# Altium PCB PCB_MPPT_v2.PcbDoc
Units mm, origin at the board's own origin, x right, y up, seen from the top; angles counter-clockwise.
Board outline 95.62 x 98.98 mm, 2 copper layers (Top Layer, Bottom Layer); 94 components, 51 nets, 295 pads, 100 vias.
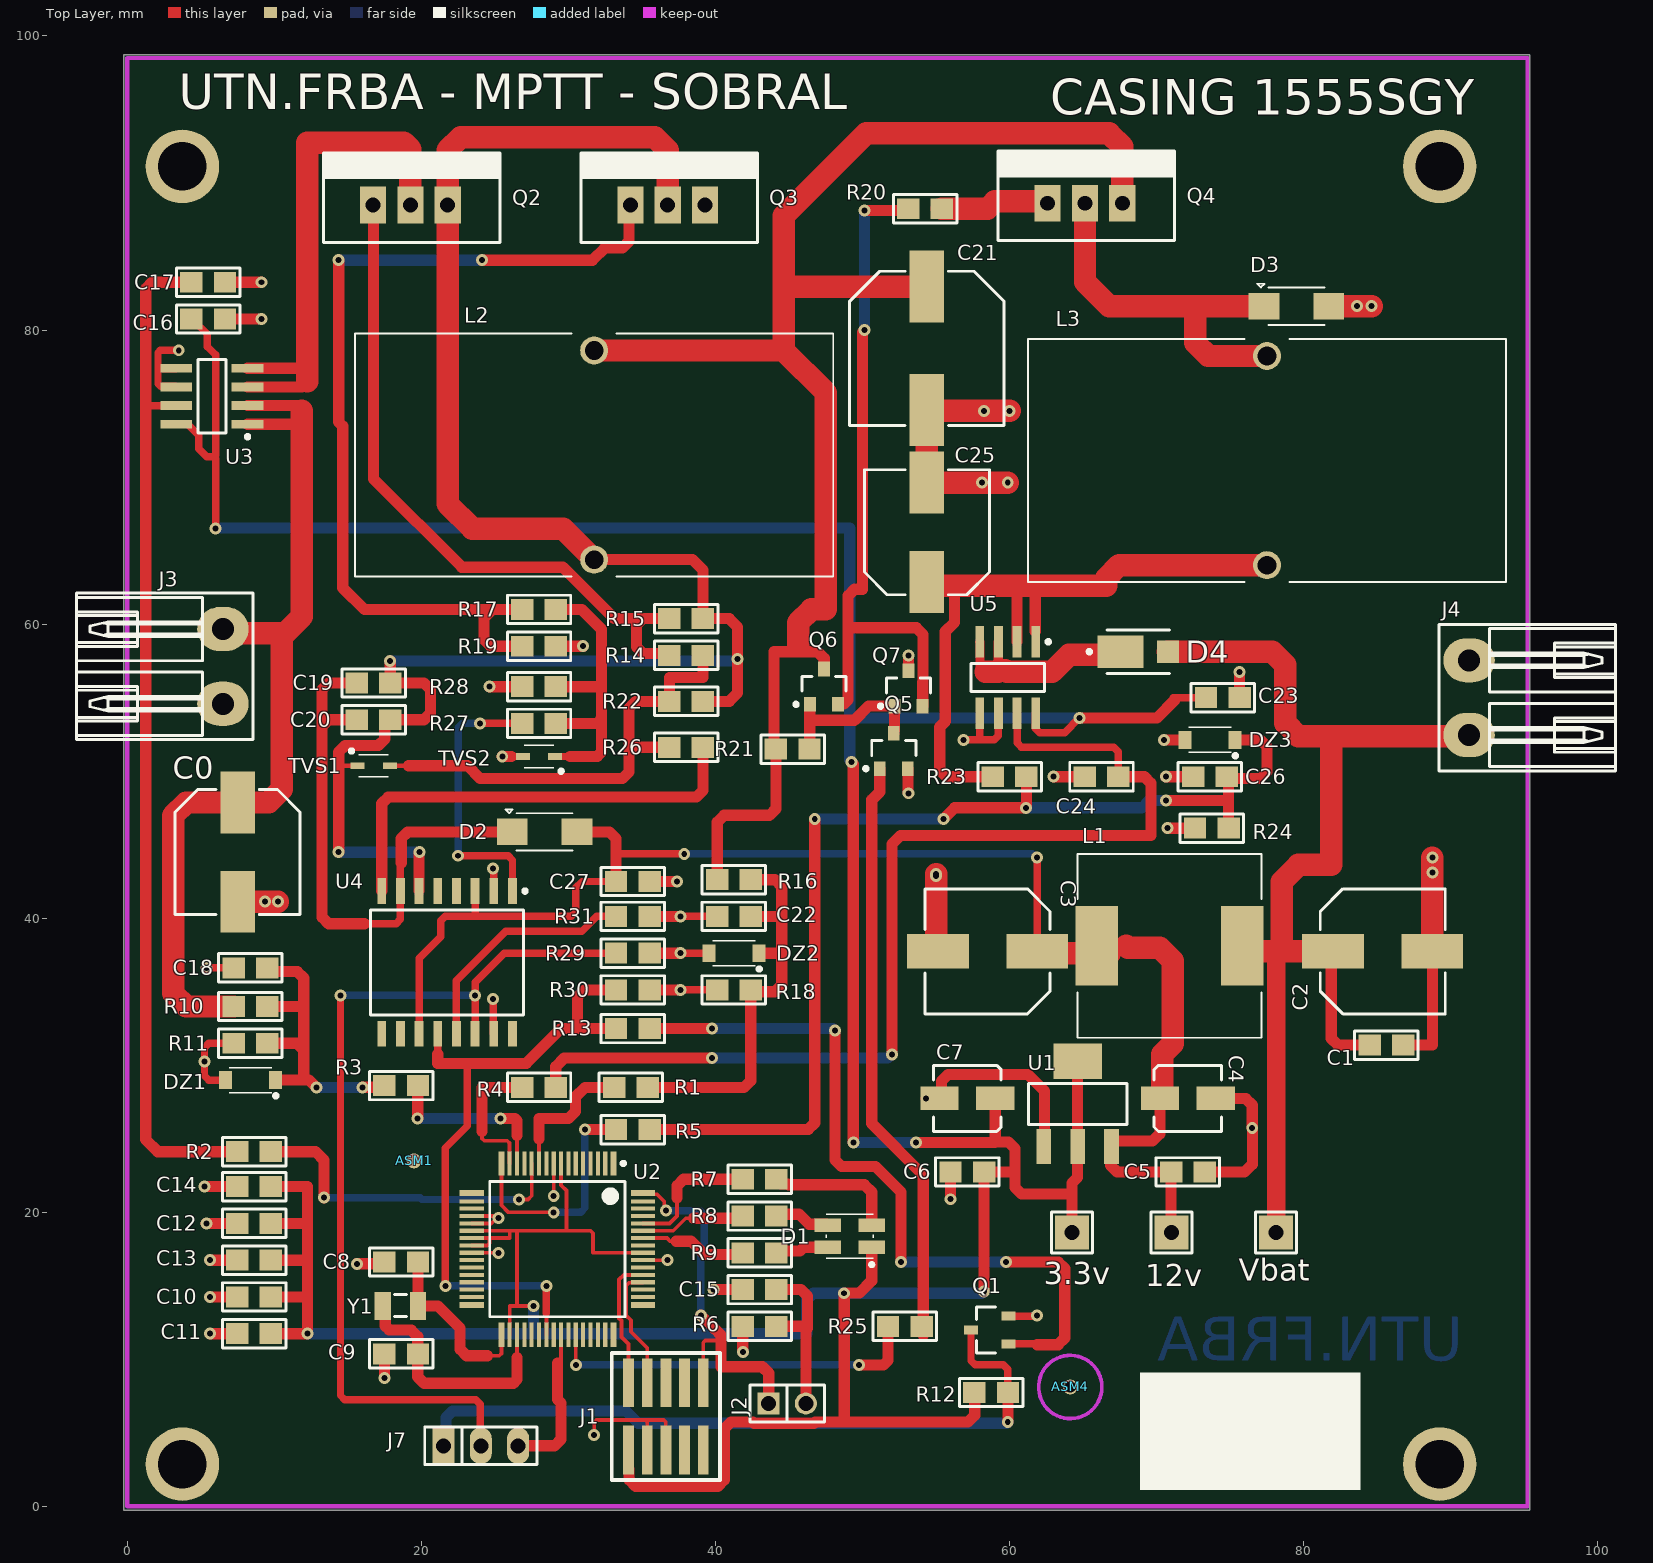
[diagram p0: Top Layer view]
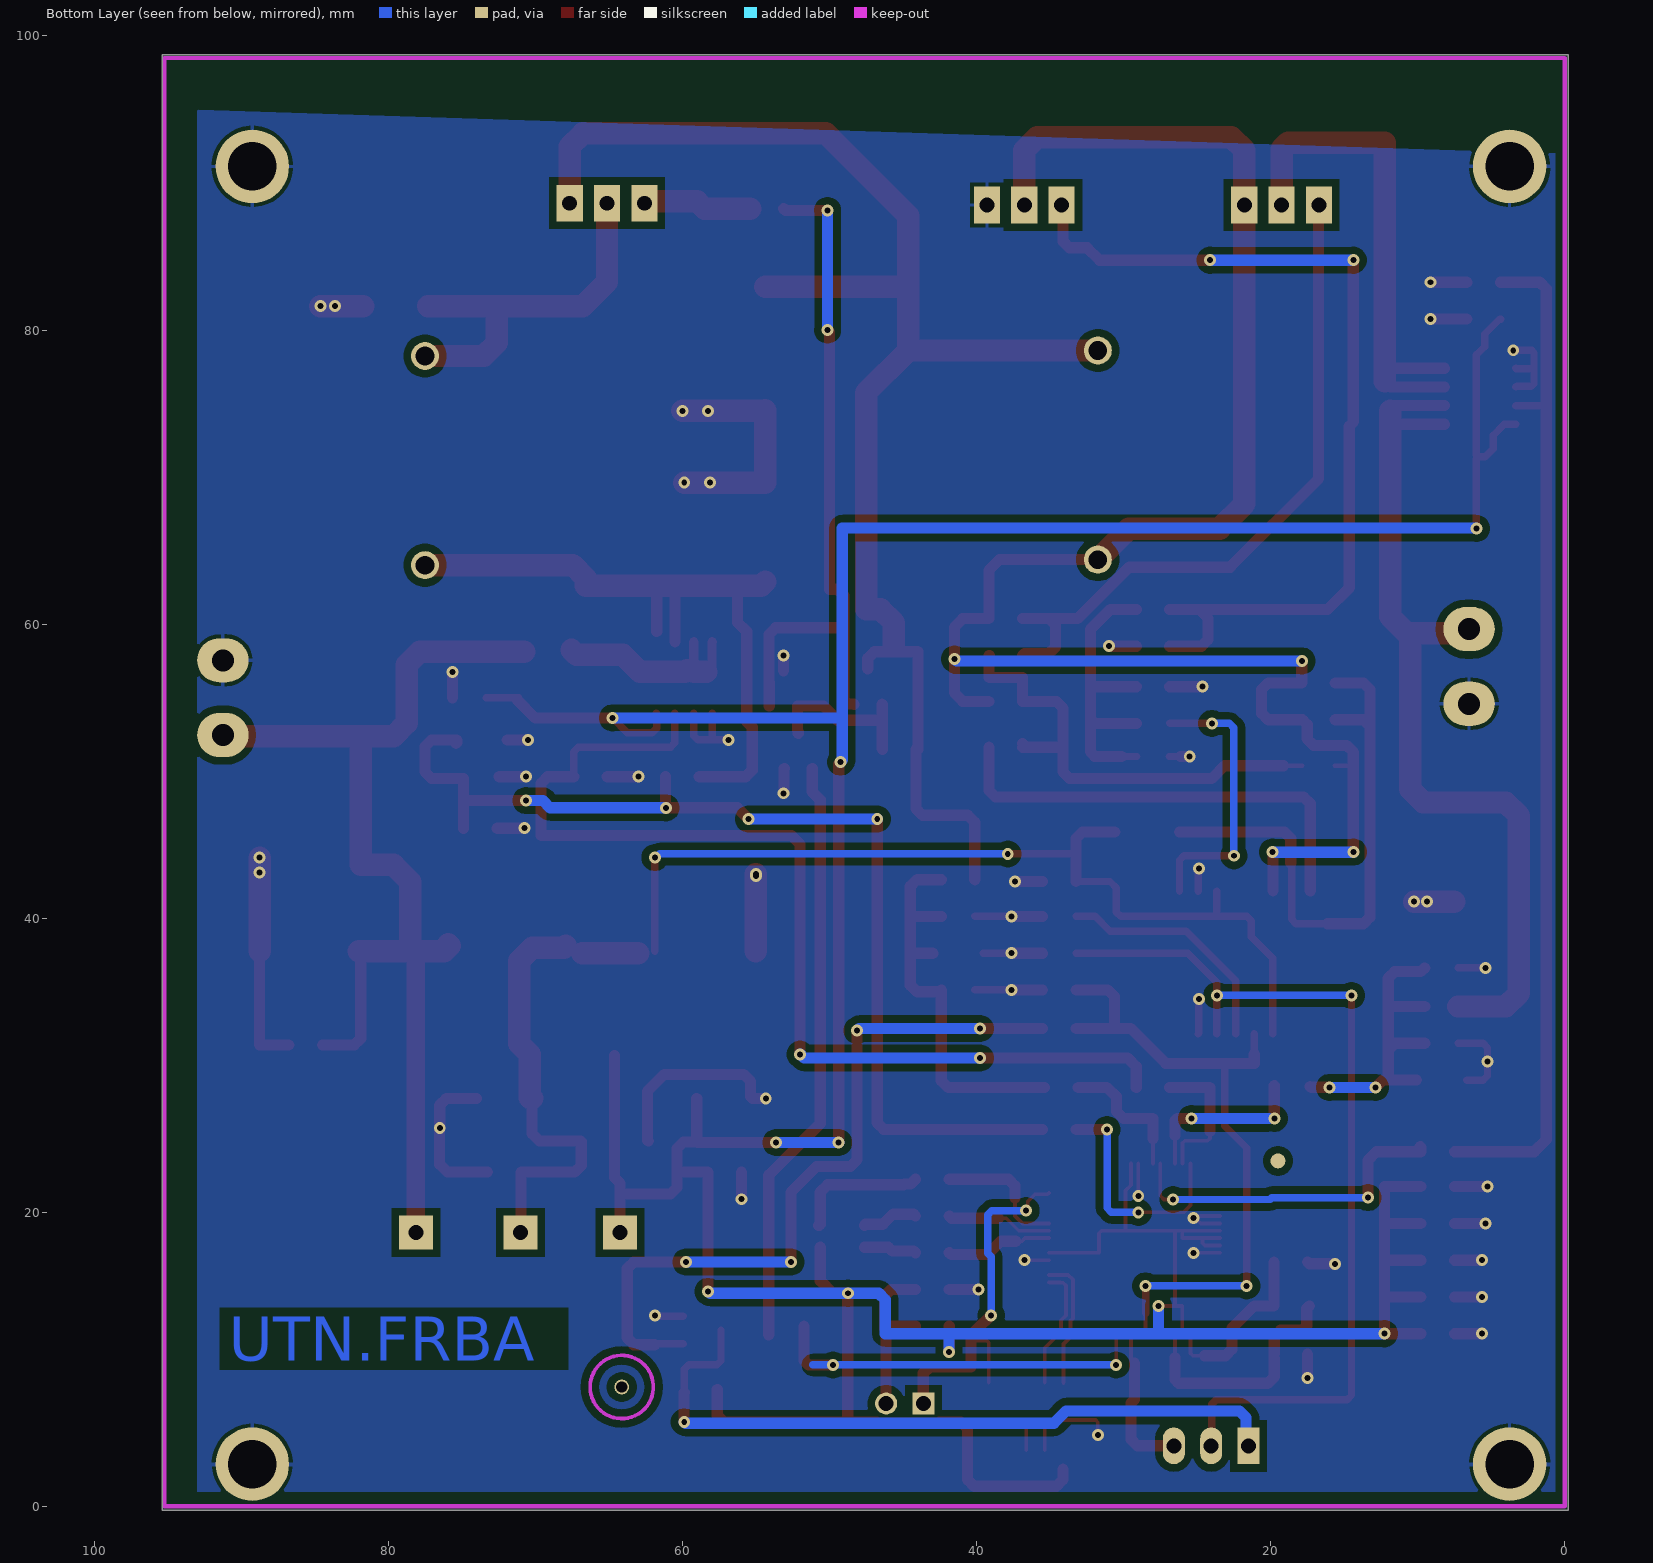
[diagram p1: Bottom Layer view, seen from below]
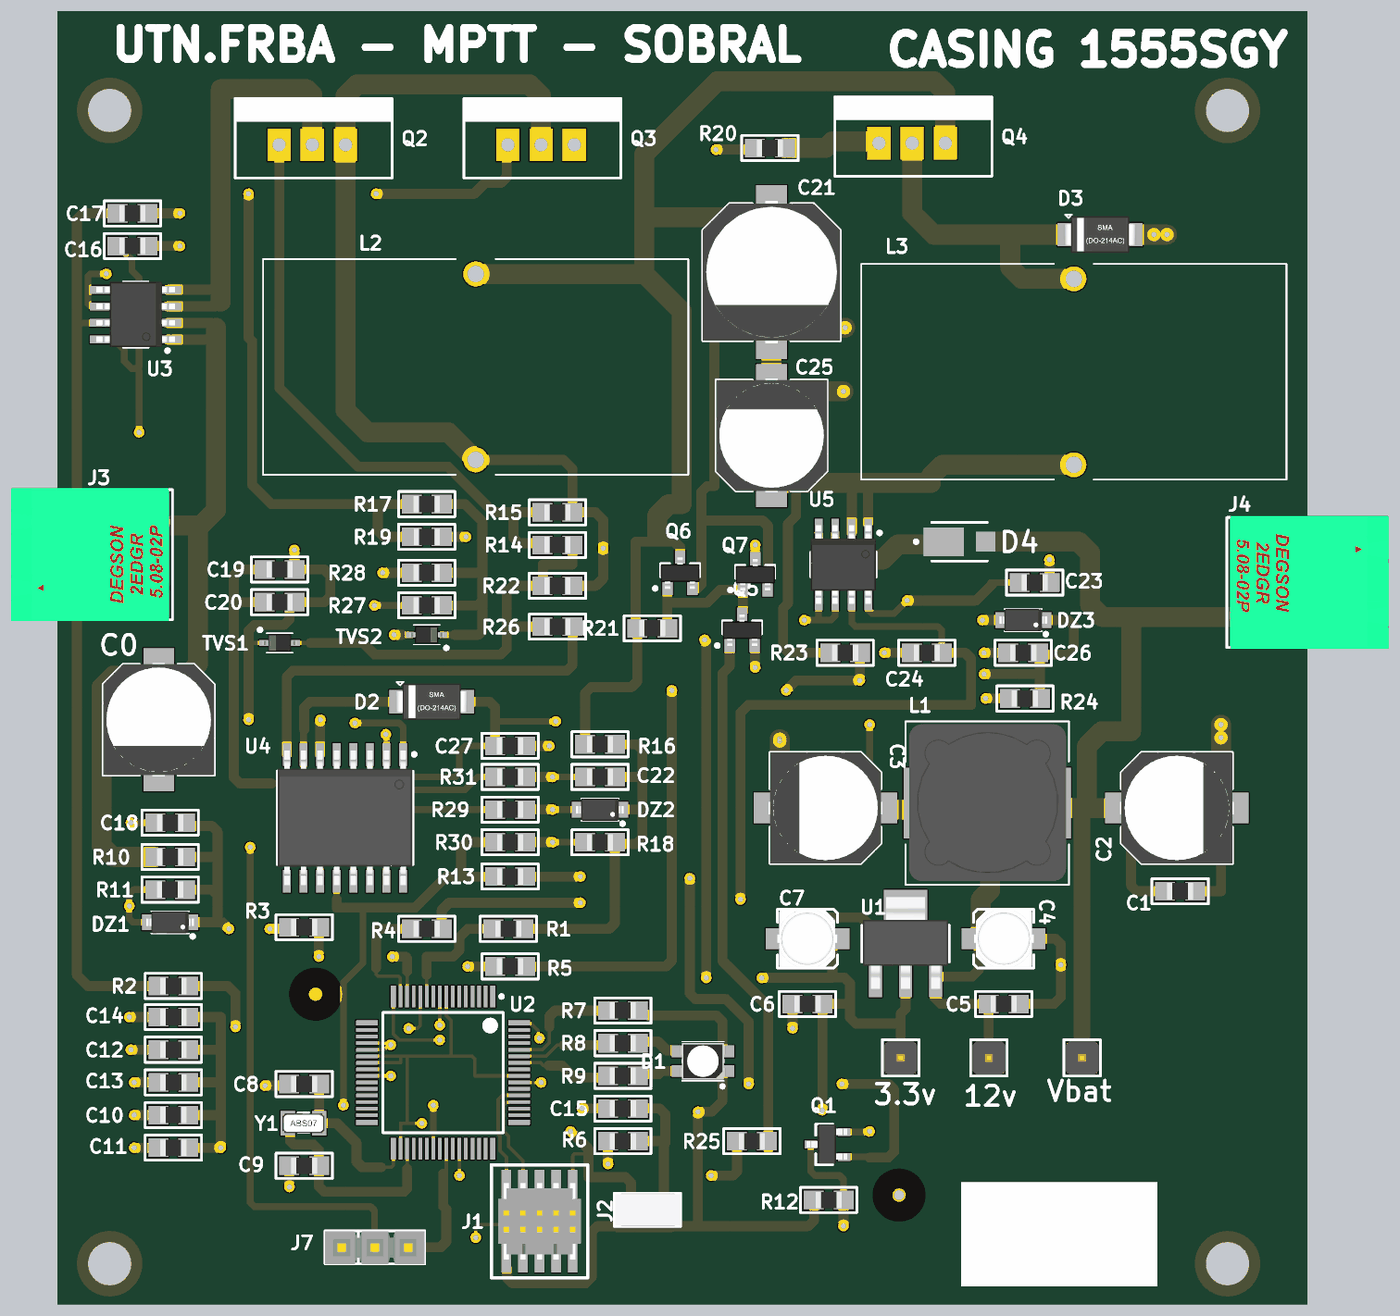
[diagram p2: 3D render of the assembled board from above, using the file's embedded part models]

## Layer stack, top to bottom
Top Solder: solder mask 0.0102, Solder Resist, Dk 3.5
Top Layer: signal copper 0.0356
Dielectric 1: dielectric 0.32, FR-4, Dk 4.8
Bottom Layer: signal copper 0.0356
Bottom Solder: solder mask 0.0102, Solder Resist, Dk 3.5

## Board outline
-0.235,-0.248 -0.235,98.735 95.382,98.735 95.373,98.688 95.373,-0.248

## Design rules (kind name [scope] priority, off if disabled: settings)
Clearance [All] p1: gap=0.203 ignorepadtopadclearanceinfootprint=FALSE except(0.5: Arc-Poly Track-Poly THPad-Poly Via-Poly Fill-Poly Poly-Poly)
HoleSize [All] p1 off: absolutevalues=TRUE maxlimit=2.54 minlimit=0.025 maxpercent=80.000 minpercent=20.000
HoleToHoleClearance [All] p1 off: gap=0.254 allowstackedmicrovias=TRUE
MinimumSolderMaskSliver [All] p1 off: minsoldermaskwidth=0.254
NetAntennae [All] p1 off: netantennaetolerance=0
PolygonConnect [All] p1: thpad.connectstyle=Relief thpad.reliefconductorwidth=0.254 thpad.reliefentries=4 thpad.polygonreliefangle="90 Angle" thpad.airgapwidth=0.254 smdpad.connectstyle=Relief smdpad.reliefconductorwidth=0.254 smdpad.reliefentries=4 smdpad.polygonreliefangle="45 Angle" smdpad.airgapwidth=0.254 via.connectstyle=Direct via.reliefconductorwidth=0.254 via.reliefentries=4 via.polygonreliefangle="90 Angle" via.airgapwidth=0.254
RoutingCorners [All] p1: cornerstyle=45-Degree minsetback=0.508 maxsetback=0.508
RoutingVias [All] p1: holewidth=0.406 width=0.813 viastyle="Through Hole" minholewidth=0.406 minwidth=0.813 maxholewidth=0.813 maxwidth=1.626
SilkToSilkClearance [All] p1 off: silktosilkclearance=0.254
SilkToSolderMaskClearance [IsPad] p1 off: minsilkscreentomaskgap=0.254 clearancetoexposedcopper=TRUE
SolderMaskExpansion [All] p1: expansion=0.102 istentingtop=FALSE
Width [All] p1: maxlimit=7.62 minlimit=0.254 preferedwidth=0.762 toplayer_maxwidth=1.524 bottomlayer_minwidth=0.508 minimp=50.000000 maximp=50.000000 favimp=50.000000
23 further rules are at their usual default settings.

## Classes and differential pairs
component class Buck2: C23 C24 C25 C26 D3 D4 DZ3 L3 Q4 Q5 Q6 Q7 R20 R21 R23 R24 R25 T1 T2 T3 U5
component class Microcontrolador: ASM1 ASM4 C8 C9 C10 C11 C12 C13 C14 C15 D1 J1 J2 R1 R2 R3 R4 R5 R6 R7 R8 R9 U2 Y1
component class Fuente: 3.3v 12v C1 C2 C3 C4 C5 C6 C7 L1 q U1 Vbat
component class Control: C0 C16 C17 C18 C19 C20 C27 D2 DZ1 J3 J4 J7 Q1 R10 R11 R12 R13 R22 R26 R27 R28 R29 R30 R31 TVS1 TVS2 U3 U4
component class Buck: C21 C22 DZ2 L2 Q2 Q3 R14 R15 R16 R17 R18 R19

## Components (designator, comment, footprint, x,y, rotation, side; value= is the part's Value field where it differs from the comment)
3.3v "3.3v" TPTH 64.25,18.625 r90 top
12v "12v" TPTH 71,18.625 r0 top
ASM1 "Fiducial" Fiducial#1 19.5,23.5 r0 top
ASM4 "Fiducial" Fiducial#2 64.125,8.125 r90 top
C0 "1mF 35V UWT" CAPSMD8x8.3 7.5,44.5 r270 top
C1 "0.1uF 25V X7R" 0805 85.625,31.375 r0 top
C2 "100uF 35V Electrolítico" CAPSMD8x8.3 85.375,37.75 r0 top
C3 "100uF 35V Electrolítico" CAPSMD8x8.3 58.5,37.75 r180 top
C4 "10uF 35V Electrolítico" CAPSMD4.3x4.3 72.125,27.75 r0 top
C5 "0.1uF 25V X7R" 0805 72.125,22.75 r0 top
C6 "0.1uF 25V X7R" 0805 57.125,22.75 r180 top
C7 "10uF 35V Electrolítico" CAPSMD4.3x4.3 57.125,27.75 r180 top
C8 "18pF 25V COG" 0805 18.625,16.625 r180 top
C9 "18pF 25V COG" 0805 18.625,10.375 r180 top
C10 "0.1uF 10v X7R" 0805 8.625,14.25 r0 top
C11 "0.1uF 10v X7R" 0805 8.625,11.75 r0 top
C12 "0.1uF 10v X7R" 0805 8.625,19.25 r180 top
C13 "0.1uF 10v X7R" 0805 8.625,16.75 r180 top
C14 "0.1uF 10v X7R" 0805 8.625,21.75 r180 top
C15 "0.1uF 25v X7R" 0805 43,14.75 r180 top
C16 "47nF 25V X7R" 0805 5.5,80.75 r0 top
C17 "4.7nF 25V X7R" 0805 5.5,83.25 r0 top
C18 "6.8pF 25V X7R" 0805 8.375,36.625 r180 top
C19 "0.1uF 50V X7R" 0805 16.75,56 r180 top
C20 "0.1uF 50V X7R" 0805 16.75,53.5 r180 top
C21 "7.5uF 450V - ULV2W7R5MNL1GS" CAPSMD10x10.3 54.375,78.75 r270 top
C22 "6.8pF 25V X7R" 0805 41.25,40.125 r180 top
C23 "47nF 25V X7R" 0805 74.5,55 r0 top
C24 "4.7nF 25V X7R" 0805 66.25,49.625 r180 top
C25 "4.7µF 35 V" CAPSMD8x8.3 54.375,66.25 r90 top
C26 "6.8pF 25V X7R" 0805 73.625,49.625 r180 top
C27 "0.1uF 50V X7R" 0805 34.375,42.5 r0 top
D1 "CLV1L-FKB" 4-plcc 49.125,18.375 r270 top
D2 "1A - 1000V - MLA621433055" DO-214AC 28.375,45.875 r0 top
D3 "1000V 1A DO214AC SMA" DO-214AC 79.5,81.625 r0 top
D4 "100V - 8A - DO-214AA" SMPA-DIODE 68.75,58.125 r0 top
DZ1 "3.3V - MMSZ5226B-AU" sod123 8.375,29 r180 top
DZ2 "3.3V - MMSZ5226B-AU" sod123 41.25,37.625 r180 top
DZ3 "3.3V - MMSZ5226B-AU" sod123 73.625,52.125 r180 top
J1 "JTAG/SWD Programmer" FTSH-105-01-XXX-DV-K 36.625,6.125 r0 top
J2 "JUMPER" JUMPER2 44.875,7 r0 top
J3 "2EDGR-5.08-02P" Bornera2_DegsonH 6.5,57.125 r270 top
J4 "2EDGR-5.08-02P" Bornera2_DegsonH 91.25,55 r90 top
J7 "Pines 2.54mm" SIP3 24.04,4.125 r0 top
L1 "100 uH - SRR1210-101M" SRR1210 70.875,38.125 r180 top
L2 "HCTI-220-5.8" IND_HCTI-220-5.8 31.75,71.5 r90 top
L3 "HCTI-220-5.8" IND_HCTI-220-5.8 77.5,71.125 r270 top
Q1 "2N7002-7-F" SOT23 59.925,11.05 r90 top
Q2 "IRF530" "TO-220 V" 19.25,88.5 r0 top
Q3 "IRF530" "TO-220 V" 36.75,88.5 r0 top
Q4 "IRF9540PBF" "TO-220 V" 65.125,88.625 r0 top
Q5 "BC817 - SOT23" SOT23-3 52.125,51.375 r90 top
Q6 "BC817 - SOT23" SOT23-3 47.375,55.75 r90 top
Q7 "BC807 - SOT23" SOT23-3 53.125,55.625 r90 top
R1 "10K 5%" 0805 34.25,28.5 r0 top
R2 "10K 5%" 0805 8.625,24.125 r180 top
R3 "10K 5%" 0805 18.625,28.625 r180 top
R4 "10K 5%" 0805 28,28.5 r0 top
R5 "10K 5%" 0805 34.375,25.625 r0 top
R6 "10K 5%" 0805 43,12.25 r180 top
R7 "1K 5%" 0805 43,22.25 r0 top
R8 "1K 5%" 0805 43,19.75 r0 top
R9 "1K 5%" 0805 43,17.25 r0 top
R10 "68k 5%" 0805 8.375,34 r180 top
R11 "10k 5%" 0805 8.375,31.5 r0 top
R12 "1k 5%" 0805 58.75,7.75 r180 top
R13 "10 5%" 0805 34.375,32.5 r180 top
R14 "10 5%" 0805 38,57.875 r0 top
R15 "1k 5%" 0805 38,60.375 r180 top
R16 "47k 5%" 0805 41.25,42.625 r180 top
R17 "10 5%" 0805 28,61 r0 top
R18 "10k 5%" 0805 41.25,35.125 r0 top
R19 "1k 5%" 0805 28,58.5 r180 top
R20 "10 5%" 0805 54.25,88.25 r180 top
R21 "4.7k 5%" 0805 45.25,51.5 r0 top
R22 "1k 5%" 0805 38,54.75 r0 top
R23 "39k 5%" 0805 60,49.625 r180 top
R24 "10k 5%" 0805 73.75,46.125 r0 top
R25 "1K 5%" 0805 52.875,12.25 r0 top
R26 "10 5%" 0805 38,51.625 r180 top
R27 "10 5%" 0805 28,53.25 r0 top
R28 "1k 5%" 0805 28,55.75 r0 top
R29 "1k 5%" 0805 34.375,37.625 r180 top
R30 "1k 5%" 0805 34.375,35.125 r180 top
R31 "1k 5%" 0805 34.375,40.125 r180 top
TVS1 "ESD5621WXX - SOD323" SOD323 16.75,50.375 r0 top
TVS2 "ESD5621WXX - SOD323" SOD323 28,51 r180 top
U1 "LT1117CST-3.3" SOT223 64.625,27.375 r0 top
U2 "LPC5441" LQFP64 29.25,17.5 r270 top
U3 "TMCS1108A4BQDR" SOIC8 5.75,75.5 r180 top
U4 "IR2110S" SOIC16W 21.75,37 r270 top
U5 "TMCS1108A4BQDR" SOIC8 59.875,56.375 r270 top
Vbat "Vbat" TPTH 78.125,18.625 r90 top
Y1 "32.768 kHz - ABS07" ABS07_Xtal 17.375,13.625 r0 top

## Footprints (in the part's own frame and the unit in brackets; to place one, negate y for a bottom-side part, rotate by r counter-clockwise, add the part's x,y. Pads: shape width x height; smd on the part's side, far side on the other; paste and mask are expansions set on the pad)
4-plcc [mm]
  rect 0.9x1.8 smd: A(0.75,1.5) B(0.75,-1.5) G(-0.75,-1.5) R(-0.75,1.5)
  silkscreen extent -1.5,-1.6 2.04,1.61, body extent -1.4,-1.75 1.4,1.75, height 1.9
0805 [mil] "Pasivo 0805"
  rect 60x56 smd: 1(-45,0) 2(45,0)
  silkscreen extent -85,-38 85,38, body extent -39,-24 39,25, height 15
ABS07_Xtal [mm]
  rect 1.1x1.9 smd: 1(0,0) 2(2.4,0)
  silkscreen extent 0.8,-0.7 1.6,0.8, body extent -0.41,-0.76 2.81,0.76, height 0.91
Bornera2_DegsonH [mm]
  oval 3x3.5 hole 1.5: 1(-2.54,0) 2(2.54,0)
  silkscreen extent -4.98,-9.95 4.98,2.05, body extent -5.08,-10.3 5.08,1.8, height 8.2
CAPSMD4.3x4.3 [mm] "Aluminum Electrolytic Capacitor, Body 8,30x8,30x10,00mm, IPC Low Density"
  rect 2.6x1.6 smd: 1(-1.9,0) 2(1.9,0)
  silkscreen extent -2.3,-2.25 2.3,2.25, body extent -2.28,-2.15 2.32,2.15, height 5.6
CAPSMD8x8.3 [mm] "Aluminum Electrolytic Capacitor, Body 8,30x8,30x10,00mm, IPC Low Density"
  rect 4.2x2.35 smd: 1(-3.375,0) 2(3.375,0)
  silkscreen extent -4.25,-4.25 4.25,4.25, body extent -4.35,-4.25 4.35,4.25, height 10
CAPSMD10x10.3 [mm] "Aluminum Electrolytic Capacitor, Body 10,30x10,30x10,00mm, IPC Low Density"
  rect 4.9x2.35 smd: 1(-4.2,0) 2(4.2,0)
  silkscreen extent -5.25,-5.25 5.25,5.25, body extent -5.45,-5.25 5.45,5.25, height 10
DO-214AC [mm]
  rect 2.1x1.8 smd: 1(2.2,0) 2(-2.2,0)
  silkscreen extent -2.67,-1.27 1.91,1.52, body extent -2.75,-1.4 2.75,1.4, height 2.6
Fiducial#1 [mil] "Fiducial Mark for PickN'Place"
  round 40 all layers, no hole mask+60: 0(0,0)
Fiducial#2 [mil] "Fiducial Mark for PickN'Place"
  round 40 hole 30 mask+60: 0(0,0)
FTSH-105-01-XXX-DV-K [mil]
  rect 29x130 smd mask+2: 1(-100,-90) 2(-100,90) 3(-50,-90) 4(-50,90) 5(0,-90) 6(0,90) 7(50,-90) 8(50,90) 9(100,-90) 10(100,90)
  silkscreen extent -145,-170 145,170, body extent -125,-115 125,115, height 237
IND_HCTI-220-5.8 [mil]
  round 75 hole 50: 1(-280,0) 2(280,0)
  silkscreen extent -325,-640 325,640
JUMPER2 [mm]
  rect 1.5x1.5 hole 1.016: 1(-1.27,0)
  round 1.5 hole 1.016: 2(1.27,0)
  silkscreen extent -2.54,-1.27 2.54,1.27, body extent -2.46,-1.27 2.54,1.27, height 9.5
LQFP64 [mm]
  rect 1.65x0.4 smd: 1(-5.825,3.81) 16(-5.825,-3.81) 33(5.825,-3.81) 48(5.825,3.81)
  rect 1.65x0.28 smd: 2(-5.825,3.25) 3(-5.825,2.75) 4(-5.825,2.25) 5(-5.825,1.75) 6(-5.825,1.25) 7(-5.825,0.75) 8(-5.825,0.25) 9(-5.825,-0.25) 10(-5.825,-0.75) 11(-5.825,-1.25) 12(-5.825,-1.75) 13(-5.825,-2.25) 14(-5.825,-2.75) 15(-5.825,-3.25) 34(5.825,-3.25) 35(5.825,-2.75) 36(5.825,-2.25) 37(5.825,-1.75) 38(5.825,-1.25) 39(5.825,-0.75) 40(5.825,-0.25) 41(5.825,0.25) 42(5.825,0.75) 43(5.825,1.25) 44(5.825,1.75) 45(5.825,2.25) 46(5.825,2.75) 47(5.825,3.25)
  rect 0.4x1.65 smd: 17(-3.81,-5.825) 32(3.81,-5.825) 49(3.81,5.825) 64(-3.81,5.825)
  rect 0.28x1.65 smd: 18(-3.25,-5.825) 19(-2.75,-5.825) 20(-2.25,-5.825) 21(-1.75,-5.825) 22(-1.25,-5.825) 23(-0.75,-5.825) 24(-0.25,-5.825) 25(0.25,-5.825) 26(0.75,-5.825) 27(1.25,-5.825) 28(1.75,-5.825) 29(2.25,-5.825) 30(2.75,-5.825) 31(3.25,-5.825) 50(3.25,5.825) 51(2.75,5.825) 52(2.25,5.825) 53(1.75,5.825) 54(1.25,5.825) 55(0.75,5.825) 56(0.25,5.825) 57(-0.25,5.825) 58(-0.75,5.825) 59(-1.25,5.825) 60(-1.75,5.825) 61(-2.25,5.825) 62(-2.75,5.825) 63(-3.25,5.825)
  silkscreen extent -5.95,-4.6 4.6,4.6, body extent -5,-5 5,5, height 1.6
SIP3 [mm]
  rect 1.5x2.5 hole 1.016: 1(-2.54,0)
  oval 1.5x2.5 hole 1.016: 2(0,0) 3(2.54,0)
  silkscreen extent -3.81,-1.27 3.81,1.27, body extent -3.81,-1.3 3.81,1.24, height 8.38
SMPA-DIODE [mm]
  rect 3.1x2.2 smd paste+0 mask+0: 1(-1.21,0)
  rect 1.5x1.52 smd paste+0 mask+0: 2(2.01,0)
  silkscreen extent -3.45,-1.48 2.12,1.48
sod123 [mm]
  rect 0.9x1.2 smd: 1(1.7,0) 2(-1.7,0)
  silkscreen extent -1.85,-0.85 1.45,1.2, body extent -1.85,-0.85 1.85,0.85, height 1.35
SOD323 [mm]
  rect 0.95x0.45 smd: 1(-1.1,0) 2(1.1,0)
  silkscreen extent -1.62,-0.75 1,1.12, body extent -1.3,-0.67 1.3,0.68, height 1.1
SOIC8 [mm]
  rect 2.15x0.6 smd: 1(-2.425,1.905) 2(-2.425,0.635) 3(-2.425,-0.635) 4(-2.425,-1.905) 5(2.425,-1.905) 6(2.425,-0.635) 7(2.425,0.635) 8(2.425,1.905)
  silkscreen extent -2.55,-2.5 0.95,2.88, body extent -3.01,-2.51 3.01,2.49, height 1.75
SOIC16W [mm] "SOIC 16 WIDE"
  rect 1.75x0.6 smd: 1(-4.85,4.445) 2(-4.85,3.175) 3(-4.85,1.905) 4(-4.85,0.635) 5(-4.85,-0.635) 6(-4.85,-1.905) 7(-4.85,-3.175) 8(-4.85,-4.445) 9(4.85,-4.445) 10(4.85,-3.175) 11(4.85,-1.905) 12(4.85,-0.635) 13(4.85,0.635) 14(4.85,1.905) 15(4.85,3.175) 16(4.85,4.445)
  silkscreen extent -4.97,-5.2 3.57,5.42, body extent -5.15,-5.15 5.15,5.15, height 2.65
SOT23 [mm]
  rect 0.6x0.95 smd: 1(0,0) 2(0.95,2.55) 3(1.9,0)
  silkscreen extent -0.6,0.87 2.5,2.17, body extent -0.53,-0.25 2.47,2.88, height 1
SOT23-3 [mm] "SOT23, 3-Leads, Body 2,90x2,45mm, Pitch 0,95mm, IPC Medium Density"
  rect 1x0.8 smd: 1(-1.2,0.95) 2(1.2,0) 3(-1.2,-0.95)
  silkscreen extent -1.32,-1.5 0.7,2.02, body extent -1.25,-1.5 1.2,1.5, height 1
SOT223 [mm] "SOT223"
  rect 1x2.4 smd: 1(-2.3,-2.9) 2(0,-2.9) 3(2.3,-2.9)
  rect 3.3x2.4 smd: 4(0,2.9)
  silkscreen extent -3.35,-1.4 3.35,1.4, body extent -3.25,-3.45 3.25,3.55, height 1.62
SRR1210 [mm]
  rect 2.9x5.4 smd: 1(-4.95,0) 2(4.95,0)
  silkscreen extent -6.25,-6.25 6.25,6.25, body extent -6.03,-6.03 5.97,5.97, height 8.05
"TO-220 V" [mil]
  rect 70x98.43 hole 40: 1(-100,0) 2(0,0) 3(100,0)
  silkscreen extent -232,-100 240,139, body extent -197,-79 197,118, height 709
TPTH [mm]
  rect 2.3x2.3 hole 1.016: 1(0,0)
  silkscreen extent -1.4,-1.4 1.4,1.4, body extent -1.27,-1.27 1.27,1.27, height 6.04

## Part data
3.3v 12v Vbat: library part TP
ASM1 ASM4: "Fiducial Mark for PCB Asembly on Pick N' Place"
C0: library part CAPPOL, "Capacitores electrolíticos de aluminio 100 µF 35 V Radial, encapsulado - terminales SMD 1000 h a 105°C. MLA621433055"
C1 C5 C6 C16 C17 C18 C22 C23 C24 C26: library part CAP
C2 C3: library part CAPPOL, "Capacitores electrolíticos de aluminio 100 µF 35 V Radial, encapsulado - terminales SMD 1000 h a 105°C"
C4 C7: library part CAPPOL, "Capacitores electrolíticos de aluminio 10 µF 35 V Radial, encapsulado - terminales SMD 2000 h a 105°C"
C8 C9: library part "CAPACITOR NON-POL", "CAP CER 0.1UF X7R 0805"
C10 C11 C12 C13 C14: library part "CAP NP", "CAP CER 0.1UF X7R 0805"
C15 C19 C20 C27: library part CAP, "CAP CER 0.1UF X7R 0805"
C21: library part CAPPOL, "CAP ALUM 7.5UF 20% 450V SMD"
C25: library part CAPPOL
D1: library part LED_RGB, "CREE LED P/N: CLV1L-FKB-CHMMQEHBB7673673CT-ND / CREE LED P/N: CLMVC-FKA-CL1D1L71BB7C3C3CT-ND"
D2 D3: library part DIODO, "Diodos Estándar 1000 V 1A Montaje en superficie SMA"
D4: library part DIODO
DZ1 DZ2 DZ3: library part "DIODO ZENER"
J1: library part JTAG, "CONN HEADER 10POS DUAL .05\" SMD -> FTSH-105-01-F-DV-K"
J3 J4: library part "BORNERA 2"
J7: library part CON3
L1: library part INDUCTOR, "SRR1210-101M - 100 µH Blindado Drum Core, Wirewound Inductivo 2.5 A 135mOhm máx. No estándar"
L2: library part INDUCTOR
L3: library part INDUCTOR, "https://ar.mouser.com/datasheet/2/643/ds-st-high-current-torodial-inductors-series-1661536.pdf"
Q1: library part "MOSFET N", "Canal N Montaje en superficie 60 V 115mA (Ta) 370mW (Ta) SOT-23-3"
Q2 Q3: library part "MOSFET N"
Q4: library part "MOSFET P"
Q5 Q6: library part "TRANSISTOR NPN", "45V NPN SMALL SIGNAL TRANSISTOR IN SOT23"
Q7: library part "TRANSISTOR PNP", "Transistor PNP, Ic 500mA, Vceo -45 Vdc. Empaque SOT23. De montaje superficial. Trabaja hasta mínimo 100MHz."
R1 R2 R3 R4 R5 R7 R8 R9 R10 R11 R12 R13 R14 R15 R16 R17 R18 R19 R20 R21 R22 R23 R24 R25 R26 R27 R28 R29 R30 R31: library part RES
R6: library part RES, "RES SMD 10K OHM 5% 1/8W 0805"
TVS1 TVS2: library part TVS
U1: "IC REG LINEAR 3.3V 800MA SOT223", Dropout Voltage(V)=1.1, Manufacturer="Linear Technology", Output Voltage="3.3 V", Supplier Part Number 1=LT1117CST-3.3-ND, ComponentLink1Description="Manufacturer URL", ComponentLink1URL=http://www.linear.com/, ComponentLink2Description=Datasheet, ComponentLink2URL=http://cds.linear.com/docs/en/datasheet/1117fd.pdf, ComponentLink3Description="Package Specification", ComponentLink3URL=http://cds.linear.com/docs/en/packaging/SOT_3_05-08-1630.pdf, DatasheetVersion="Rev. D", Discrete Pass Element=no, Iout(mA)=800, Isupply(mA)=5, Mounting Technology="Surface Mount", Number of Outputs=1, PackageDescription="3-Pin Plastic SOT-223, 3.505 x 6.505 mm Body, Pitch 2.3 mm", PackageReference=ST-3, PackageVersion=Jun-10, PartNumber=LT1117CST-3.3, PSRR(dB)=75, RoHS=FALSE, Supplier 1=Digi-Key, Supplier 2=Newark, Supplier Part Number 2=57M1797, Vin Max(V)=15, Vin Min(V)=2.45
U3 U5: library part MLX91221KDC, "Sensores de corriente 1 canal Efecto Hall Bidireccional 8-SOIC (ancho 0.154\", 3.90mm)"
U4: library part "IR2110 16", "Medio puente controladores de compuerta IC No inversor 14-DIP"
Y1: library part "XTAL ABS07", "XTAL ABS07 by ABRACON LLC"

## Free pads (board coordinates)
  round 5 hole 3.3 mask+0.102: 2(3.75,2.875) 2(3.75,91.125) 2(89.25,2.875) 2(89.25,91.125)

## Via types
v1: diameter 0.813, hole 0.406, Top Layer to Bottom Layer, 100 vias

## Nets (pads, with @x,y where several pads share a name; then routed paths per layer and width w, separated by ;. In a path a pad name is that pad's centre, name@x,y a point inside that pad or via, vN(x,y) a via of type N, cw(c..) or ccw(c..) an arc to the next point about the centre after c; other vN are vias at no path point)
+3.3V: 3.3v.1 C6.1 C7.1 C10.2 C11.2 C12.1 C13.1 C14.1 C16.1 C23.1 D1.A J1.1 R6.2 R12.2 U1.2 U1.4 U2.8 U2.22 U2.23 U2.24 U2.34 U2.56 U3.8 U5.8 | length 327.4
  Top Layer w0.254: U2.24 24.476,17.75 24.625,17.899 24.625,18.225 24.65,18.25 ; U2.23 24.65,18.25 ; U2.22 26,18.75 ; U2.34 26,13.625 26.5,13.625 ; v1(27.625,13.625) 26.5,13.625 ; U2.8 29.5,21.842 29.862,21.48 29.862,18.75 ; U2.56 31.667,17.25 31.667,18.583 31.5,18.75 29.862,18.75 ; 24.65,18.25 26,18.25 26,18.75 ; 26,18.75 26.5,18.75 ; 26.5,13.625 26.5,18.75 ; 26.5,18.75 29.862,18.75
  Top Layer w0.508: U3.8 4.1,73.595 4.864,72.831 4.864,71.917 5.407,71.375 5.875,71.375 ; C16.1 4.408,80.75 5.452,79.705 5.452,78.875 6,78.327 6,71.5 5.875,71.375 ; v1(6,66.5) 6,71.25 5.875,71.375 ; U5.8 61.75,53.92 61.75,52.923 62.048,52.625 63.75,52.625 v1(64.75,53.625) ; 71.125,55 C23.1
  Top Layer w0.762: C11.2 v1(12.25,11.75) 12.25,19.25 ; C10.2 12.125,14.25 ; C13.1 12.125,16.75 ; C12.1 12.25,19.25 ; C14.1 12.25,21.75 12.25,19.25 ; J1.1@34.125,2.524 34.125,1.821 34.571,1.375 40.165,1.375 40.611,1.821 40.611,5.304 41.058,5.75 42.529,5.75 42.613,5.666 46.698,5.666 46.782,5.75 48.75,5.75 ; R6.2 41.857,10.532 41.875,10.514 v1(41.875,10.5) ; v1(49.25,50.616) 49.25,50.602 49.375,50.477 v1(49.375,24.75) ; D1.A 50.625,15.355 49.78,14.51 48.76,14.51 v1(48.75,14.5) 48.75,5.75 ; v1(53.625,24.75) 59,24.75 ; R12.2@57.625,7.95 57.625,6.196 57.179,5.75 48.75,5.75 ; v1(58.25,14.625) 58.268,14.643 C6.1 60.375,22.75 ; C7.1 59.025,24.775 59.929,24.775 60.375,24.329 60.375,22.75 ; U1.4@64.625,30.65 64.625,22.375 64.25,22 64.25,21.25 ; v1(64.75,53.625) 70.014,53.625 71.25,54.861 ; 3.3v.1@64.875,19 64.25,19 64.25,21.25 ; 60.375,22.75 60.375,21.696 60.821,21.25 64.25,21.25
  Bottom Layer w0.762: v1(6,66.5) 6.037,66.537 49.049,66.537 ; v1(12.25,11.75) 27.625,11.75 ; v1(27.625,13.625) 27.625,11.75 ; v1(41.875,10.5) 41.875,11.625 42,11.75 ; 49.125,66.537 49.125,53.625 ; v1(49.25,50.616) 49.25,50.629 49.125,50.754 49.125,53.625 ; v1(49.375,24.75) v1(53.625,24.75) ; v1(58.25,14.625) 58.236,14.625 58.111,14.5 46.648,14.5 46.202,14.054 46.202,13.625 46.202,11.75 42,11.75 ; 3.3v.1@64.125,18.5 3.3v.1 ; v1@64.736,53.625 49.125,53.625 ; 27.625,11.75 42,11.75
+12V: 12v.1 C3.1 C4.1 C5.1 C27.1 D2.1 L1.2 U1.3 U4.3 U4.11 | length 97.6
  Top Layer w0.508: U4.11 19.845,37.268 21.327,38.75 21.327,39.827 21.624,40.125 23.655,40.125 ; U4.3 23.655,40.125 ; C27.1 30.923,42.5 30.5,42.077 30.5,40.423 30.202,40.125 23.655,40.125 ; 33.232,44.375 v1(37.875,44.375) ; C3.1 v1(61.875,44.125)
  Top Layer w0.762: D2.1 32.786,45.875 33.232,45.429 33.232,44.375 C27.1 ; C4.1 70.225,25.35 69.725,24.85 66.925,24.85 66.875,24.8 66.875,23.196 67.321,22.75 C5.1 12v.1@70.982,19.107
  Top Layer w1.524: C3.1@63,37.625 L1.2@66.8,37.625 ; 67.925,38.125 68.05,38 70.207,38 71.1,37.107 71.1,31.475 70.375,30.75 70.375,27.788 70.337,27.75 C4.1
  Bottom Layer w0.508: v1(37.875,44.375) 61.543,44.375 61.793,44.125 v1(61.875,44.125)
ADC_I_Buck2: C24.1 R4.2 U5.7 | length 73.5
  Top Layer w0.508: U5.7 60.51,51.923 60.808,51.625 67,51.625 ; 67.095,51.625 67.393,51.327 C24.1
  Top Layer w0.762: R4.2 29.143,29.929 29.714,30.5 v1(39.75,30.5) ; v1(52,30.75) 52,45.054 52.571,45.625 69.625,45.625 69.625,49.179 69.179,49.625 C24.1
  Bottom Layer w0.762: v1(39.75,30.5) 51.736,30.5 51.986,30.75 v1(52,30.75)
ADC_Icc: C17.1 R2.2 U3.7 | length 69.8
  Top Layer w0.508: 1.25,74.865 U3.7
  Top Layer w0.762: C17.1 1.696,83.25 1.25,82.804 1.25,74.865 1.25,24.946 2.071,24.125 R2.2
ADC_V_Buck2: C26.1 DZ3.2 R5.2 R23.1 R24.2 | length 73.3
  Top Layer w0.762: R5.2 46.304,25.625 46.75,26.071 v1(46.75,46.75) ; v1(55.5,46.75) 56.259,47.509 v1(61.125,47.509) ; v1@61.143,47.541 R23.1 ; v1@70.639,48 74.893,48 ; R24.2 74.893,48 ; DZ3.2@75.394,51.906 75.325,51.975 DZ3.2 77.054,52.125 77.5,51.679 77.5,49.946 77.054,49.5 74.893,49.5 74.893,48
  Bottom Layer w0.762: v1(46.75,46.75) v1(55.5,46.75) ; v1(61.125,47.509) 68.999,47.509 69.49,48 v1(70.625,48)
ADC_Vcc: C18.1 DZ1.2 R3.2 R10.1 R11.2 | length 22.3
  Top Layer w0.762: R11.2 11.554,31.5 12,31.054 ; R10.1 12,34 ; C18.1 9.768,36.375 11.554,36.375 12,35.929 12,34 ; DZ1.2 12,29 ; v1(12.875,28.5) 12.861,28.5 12.361,29 12,29 ; v1(16,28.5) 16.01,28.51 17.26,28.51 R3.2@17.315,28.565 ; 12,29 12,31.054 ; 12,31.054 12,34
  Bottom Layer w0.762: v1(12.875,28.5) v1(16,28.5)
ADC_Vo: C22.1 DZ2.2 R1.2 R16.1 R18.2 | length 28.4
  Top Layer w0.762: R1.2 41.947,28.5 42.393,28.946 R18.2 42.518,35 44.054,35 44.5,35.446 44.5,37.625 ; C22.1 44.5,40.125 ; R16.1 44.054,42.625 44.5,42.179 44.5,40.125 ; DZ2.2 44.5,37.625 ; 44.5,37.625 44.5,40.125
GND: C0.2 C1.2 C2.2 C3.2 C4.2 C5.2 C6.2 C7.2 C8.2 C9.2 C10.1 C11.1 C12.2 C13.2 C14.2 C15.2 C16.2 C17.2 C18.2 C21.2 C22.2 C23.2 C24.2 C25.2 C26.2 C27.2 D3.1 DZ1.1 DZ2.1 DZ3.1 J1.3 J1.5 J3.2 J4.2 pad.2 Q1.3 Q3.3 Q5.3 Q7.2 R11.1 R18.1 R19.1 R24.1 R28.1 R29.1 R30.1 R31.1 TVS2.2 U1.1 U2.9 U2.20 U2.21 U2.25 U2.55 U3.5 U3.6 U4.2 U4.15 U5.5 U5.6 | length 164.4
  Top Layer w0.254: U2.25 v1(25.25,17.25) ; U2.21 24.75,19.25 25.125,19.625 v1(25.25,19.625) ; U2.20 v1@24.974,19.75 ; v1(29,21.125) U2.9 ; v1(31.75,4.875) 31.75,5.726 31.899,5.875 35.206,5.875 ; U2.55 v1(36.75,16.75) ; J1.3 35.355,5.726 35.206,5.875 ; J1.5 36.625,5.726 36.476,5.875 35.206,5.875 ; v1@61.825,12.95 v1(61.875,13)
  Top Layer w0.508: U3.6 3.279,76.181 2.258,76.181 2.088,76.351 2.088,77.375 ; U3.5 3.295,77.375 2.088,77.375 ; v1(3.5,78.625) 2.254,78.625 2.088,78.459 2.088,77.375 ; v1(5.375,36.625) C18.2 ; DZ1.1 5.548,29 5.25,29.298 v1(5.25,30.25) 5.25,31.202 5.548,31.5 R11.1 ; v1(24.875,34.5) 24.9,34.475 24.9,32.175 U4.15 ; v1(24.875,43.386) 24.925,43.336 U4.2 ; 26.125,51 TVS2.2 ; v1(37.625,35.125) R18.1 ; v1(37.625,37.625) DZ2.1 ; v1(37.625,40.125) C22.2 ; v1(56.875,52.125) 58.125,52.125 58.125,52.173 ; U5.5 57.97,52.328 58.125,52.173 ; U5.6 59.24,52.423 58.942,52.125 58.173,52.125 58.125,52.173 ; Q1.3 v1@61.825,12.95
  Top Layer w0.762: v1(5.25,21.75) C14.2 ; v1(5.375,19.25) C12.2 ; v1(5.625,11.75) C11.1 ; v1(5.625,14.25) C10.1 ; v1(5.625,16.75) C13.2 ; C16.2 v1(9.125,80.75) ; C17.2 v1(9.125,83.25) ; v1(15.625,16.5) 15.635,16.51 17.347,16.51 17.357,16.5 C8.2 ; C9.2 17.482,8.768 v1(17.5,8.75) ; v1(24.625,55.75) R28.1 ; v1(25.5,51) 26.125,51 ; R19.1 v1(31,58.5) ; R30.1 v1(37.625,35.125) ; R29.1 v1(37.625,37.625) ; R31.1 v1(37.625,40.125) ; C27.2 v1(37.375,42.5) ; v1(39.875,14.75) C15.2 ; Q5.3 53.094,50.156 53.094,48.545 53.125,48.514 v1(53.125,48.5) ; Q7.2 v1(53.125,57.875) ; v1(54.331,27.75) C7.2 55.375,27.9 55.375,28.929 55.821,29.375 61.25,29.375 62.375,28.25 62.375,24.9 U1.1@62.325,24.85 ; C3.2@55,37.75 C3.2 ; v1(55.982,20.893) C6.2 ; v1(63,49.625) C24.2 ; v1(70.5,52.125) DZ3.1 ; v1(70.625,49.625) C26.2 ; v1(70.75,46.125) R24.1 ; C5.2 75.982,22.75 76.51,23.277 76.51,25.74 v1(76.5,25.75) 76.5,27.304 76.054,27.75 C4.2 ; v1(75.625,56.75) 75.625,56.736 75.643,56.718 C23.2 ; C1.2 88.75,31.375 C2.2
  Top Layer w1.524: C0.2 v1(9.375,41.125) v1(10.25,41.125) ; C3.2@55,37.75 v1(55,43.011) v1(55,42.875) ; v1(59.875,69.625) v1(58.125,69.625) C25.2 C21.2 54.425,74.5 v1(58.25,74.5) v1(60,74.5) ; D3.1 v1(83.625,81.625) v1(84.625,81.625) ; C2.2 v1(88.75,43.125) v1(88.75,44.125)
NetC8_1: C8.1 U2.33 Y1.2 | length 12.2
  Top Layer w0.254: 24.5,10.25 25.291,10.25 25.44,10.399 U2.33
  Top Layer w0.762: C8.1 19.772,16.622 19.772,13.628 Y1.2 21.125,13.625 22.625,12.125 22.625,10.696 23.071,10.25 24.5,10.25
NetC9_1: C9.1 U2.35 Y1.1 | length 16.8
  Top Layer w0.254: 26.5,10.125 U2.35
  Top Layer w0.762: Y1.1 17.544,13.456 17.544,12.277 17.821,12 19.304,12 19.75,11.554 19.75,10.393 C9.1 19.768,10.063 19.75,10.045 19.75,8.821 20.196,8.375 26.25,8.375 26.5,8.625 26.5,10.125
NetC15_1: C15.1 J2.2 R6.1 | length 11.8
  Top Layer w0.762: R6.1 46.125,12.25 46.25,12.125 46.25,14.304 45.804,14.75 C15.1 ; J2.2@46.145,7.02 46.145,12.23
NetC19_1: C19.1 C20.1 L2.1 Q2.3 Q3.2 R15.1 R22.2 TVS1.1 U4.6 | length 129.4
  Top Layer w0.305: 14.5,50.375 TVS1.1
  Top Layer w0.762: v1(14.375,44.5) 14.375,51.304 14.821,51.75 17.066,51.75 17.512,52.196 17.512,53.17 17.842,53.5 20.179,53.5 20.625,53.946 20.625,55.554 20.179,56 C19.1 17.884,56.009 17.884,57.491 v1(17.875,57.5) ; U4.6 19.845,44.456 19.875,44.486 v1(19.875,44.5) ; L2.1 38.434,64.388 39.143,63.679 R15.1 40.929,60.375 41.5,59.804 41.5,55.321 40.929,54.75 R22.2
  Top Layer w1.524: L2.1 29.638,66.5 23.469,66.5 21.79,68.179 Q2.3 21.79,92.232 22.683,93.125 35.857,93.125 36.75,92.232 Q3.2
  Bottom Layer w0.762: v1(14.375,44.5) 14.385,44.49 19.865,44.49 v1(19.875,44.5) ; v1@17.889,57.5 41.361,57.5 41.486,57.625 v1(41.5,57.625)
NetC19_2: C19.2 C20.2 D2.2 U4.7 | length 39.5
  Top Layer w0.508: 16.125,39.625 18.277,39.625 18.575,39.923 U4.7 18.575,43.7 18.625,43.75
  Top Layer w0.762: C20.2 13.696,53.5 13.25,53.054 ; C19.2 13.696,56 13.25,55.554 13.25,53.054 ; 16.125,39.625 13.696,39.625 13.25,40.071 13.25,53.054 ; 18.625,43.75 18.625,45.429 19.071,45.875 D2.2
NetC25_1: C25.1 L3.2 R23.2 U5.1 U5.2 | length 48.1
  Top Layer w0.762: 56.375,62.625 56.25,62.5 56.25,60.125 55.625,59.5 55.625,53.375 55.25,53 55.25,50.071 55.696,49.625 R23.2 ; 60,62.625 60.51,62.115 U5.2 ; U5.1@61.75,59.494 61.75,62.625
  Top Layer w1.524: C25.1 54.625,62.625 56.375,62.625 60,62.625 61.75,62.625 66.56,62.625 66.56,63.12 67.453,64.013 L3.2
NetD1_B: D1.B R9.2 | length 3.6
  Top Layer w0.762: R9.2 44.268,17.375 45.75,17.375 46,17.625 D1.B
NetD1_G: D1.G R8.2 | length 3.8
  Top Layer w0.762: R8.2 44.268,19.875 45.679,19.875 46.36,19.194 47.556,19.194 D1.G
NetD1_R: D1.R R7.2 | length 9.2
  Top Layer w0.762: R7.2 44.473,21.92 44.926,21.92 44.97,21.875 50.135,21.875 50.625,21.385 50.625,19.194 50.694,19.125 D1.R@50.75,19.125
NetD3_2: D3.2 L3.1 Q4.2 | length 26
  Top Layer w1.524: Q4.2 65.125,83.268 66.768,81.625 72.625,81.625 ; D3.2 72.625,81.625 ; L3.1 73.518,78.237 72.625,79.13 72.625,81.625
NetD4_1: D4.1 U5.3 U5.4 | length 14
  Top Layer w0.635: U5.4 57.987,58.782 57.987,57.132 58.359,56.76 ; 59.24,56.875 U5.3
  Top Layer w1.524: 58.359,56.76 59.24,56.76 ; 59.24,56.875 59.695,56.875 59.81,56.76 62.885,56.76 64.037,57.912 67.202,57.912 D4.1@67.54,58.25
NetJ7_1: J7.1 Q1.2 R12.1 | length 49.2
  Top Layer w0.508: Q1.2 57.375,9.923 57.673,9.625 59.577,9.625 59.875,9.327 R12.1@59.875,7.732
  Top Layer w0.762: v1(59.875,5.75) 59.884,5.759 59.884,7.723 R12.1@59.875,7.732
  Bottom Layer w0.762: J7.1 21.675,4.3 21.675,6.043 22.121,6.489 33.91,6.489 34.734,5.666 59.791,5.666 v1(59.875,5.75)
NetJ7_2: J7.2 R29.2 U4.14 | length 63
  Top Layer w0.508: v1(14.5,34.75) 14.5,7.548 14.798,7.25 23.702,7.25 24,6.952 J7.2@24,4 ; U4.14 v1(23.655,34.75) 23.655,35.655 25.625,37.625 R29.2
  Bottom Layer w0.508: v1(14.5,34.75) v1(23.655,34.75)
NetQ1_1: Q1.1 R13.1 | length 51.7
  Top Layer w0.508: Q1.1 61.825,11.05 61.875,11
  Top Layer w0.762: R13.1 v1(39.75,32.5) ; v1(48.125,32.375) 48.125,23.571 48.571,23.125 50.875,23.125 52.625,21.375 v1(52.625,16.625) ; v1(59.75,16.625) 63.304,16.625 63.75,16.179 63.75,11.446 63.304,11 61.875,11
  Bottom Layer w0.762: v1(39.75,32.5) 47.986,32.5 48.111,32.375 v1(48.125,32.375) ; v1(52.625,16.625) v1(59.75,16.625)
NetQ2_1: Q2.1 R14.1 R15.2 | length 47.3
  Top Layer w0.762: Q2.1 16.74,88.47 16.74,69.885 22.75,63.875 29.615,63.875 33.115,60.375 35.071,60.375 ; R14.1 36.732,58 35.071,58 34.625,58.446 34.625,59.929 35.071,60.375 ; R15.2 35.071,60.375
NetQ3_1: Q3.1 R17.1 R19.2 | length 62.9
  Top Layer w0.762: v1(14.375,84.75) 14.375,73.743 14.649,73.469 14.649,62.476 16.125,61 24.696,61 R17.1 ; v1(24.125,84.75) 31.635,84.75 32.475,85.59 33.679,85.59 34.125,86.037 34.125,88.415 Q3.1 ; 24.696,60.875 24.25,60.429 24.25,58.946 24.696,58.5 R19.2
  Bottom Layer w0.762: v1(14.375,84.75) v1(24.125,84.75)
NetQ4_1: Q4.1 R20.1 | length 7.5
  Top Layer w1.524: R20.1 58.5,88.25 59,88.75 62.46,88.75 Q4.1
NetQ5_1: Q5.1 R25.2 | length 40.2
  Top Layer w0.762: Q5.1 51.175,48.604 50.625,48.054 50.625,26.044 54.125,22.544 R25.2@54.125,11.652
NetQ5_2: Q5.2 Q6.1 Q7.1 R21.2 | length 11
  Top Layer w0.762: R21.2 46.409,51.516 46.409,54.534 Q6.1 ; 46.5,53.466 49.44,53.466 50.399,54.425 Q7.1 52.175,52.725 52.125,52.675 Q5.2
NetQ6_3: Q6.3 Q7.3 R20.2 | length 48.1
  Top Layer w0.762: Q6.3 48.325,54.551 48.344,54.57 48.733,54.57 49.008,54.846 49.008,59.75 ; v1(50.125,80) 50,79.875 50,62.375 49.455,62.375 49.008,61.929 49.008,59.75 ; v1(50.125,88.125) 50.135,88.135 52.992,88.135 R20.2 ; Q7.3 54.094,54.444 54.094,56.068 54.116,56.089 54.116,59.304 53.669,59.75 49.008,59.75
  Bottom Layer w0.762: v1(50.125,80) v1(50.125,88.125)
NetR1_1: R1.1 U2.11 | length 9.6
  Top Layer w0.254: U2.11 28,25
  Top Layer w0.762: 28,25 28,26.375 30,26.375 30.489,26.864 30.489,27.864 31.125,28.5 R1.1
NetR2_1: R2.1 U2.12 | length 23.2
  Top Layer w0.254: v1(26.625,20.875) 27.25,20.875 27.5,21.125 U2.12
  Top Layer w0.762: R2.1@9.819,24.455 9.768,24.404 R2.1 12.794,24.125 13.375,23.544 v1(13.375,21)
  Bottom Layer w0.508: v1(13.375,21) 19.908,21 20.033,20.875 v1(26.625,20.875)
NetR3_1: R3.1 U2.14 | length 11.6
  Top Layer w0.254: U2.14 26.5,25.25
  Top Layer w0.762: v1(19.75,26.375) R3.1@19.75,28.607 ; v1(25.375,26.375) 26.351,26.375 26.5,26.226 26.5,25.25
  Bottom Layer w0.762: v1@20.125,26.375 v1(25.375,26.375)
NetR4_1: R4.1 U2.15 | length 9.6
  Top Layer w0.254: 24.125,25.5 24.125,25.024 24.274,24.875 25.838,24.875 25.987,24.726 25.987,23.338 U2.15
  Top Layer w0.762: 24.125,25.5 24.125,28.5 R4.1
NetR5_1: R5.1 U2.16 | length 16.3
  Top Layer w0.254: U2.16 25.44,20.477 25.917,20 v1(29,20)
  Top Layer w0.762: v1(31.125,25.625) R5.1
  Bottom Layer w0.508: v1(29,20) 30.827,20 31.125,20.298 v1(31.125,25.625)
NetR14_2: R14.2 R22.1 R26.2 TVS1.2 | length 32.5
  Top Layer w0.254: 18.875,50.375 19.125,50.375
  Top Layer w0.305: TVS1.2 18.875,50.375
  Top Layer w0.762: 19.125,50.375 23.125,50.375 24,49.5 33.679,49.5 34.125,49.946 34.125,51.625 ; R26.2@36.732,51.75 R26.2@36.875,51.893 ; R26.2 34.125,51.625 ; R14.2@39.125,57.857 R14.2 39.143,56.375 36.875,56.375 36.875,54.75 R22.1 34.571,54.75 34.125,54.304 34.125,51.625
NetR17_2: R17.2 R27.2 R28.2 TVS2.1 | length 21.6
  Top Layer w0.508: TVS2.1 30.125,51
  Top Layer w0.762: R27.2 31.929,53.25 32.25,53.571 ; R28.2 32.25,55.75 ; R17.2 30.905,61 32.25,59.655 32.25,56.625 32.25,55.75 ; 30.125,51 31.952,51 32.25,51.298 32.25,53.571 ; 32.25,53.571 32.25,55.75
NetR26_1: R26.1 U4.8 | length 31.1
  Top Layer w0.762: U4.8 17.305,47.804 17.751,48.25 38.697,48.25 39.143,48.696 R26.1
NetR27_1: R27.1 U4.1 | length 19.1
  Top Layer w0.508: v1(22.5,44.25) 25.897,44.25 26.195,43.952 U4.1 ; v1(24,53.25) R27.1
  Bottom Layer w0.508: v1(22.5,44.25) 22.5,52.952 22.798,53.25 v1(24,53.25)
NetR31_2: R31.2 U4.13 | length 16.3
  Top Layer w0.508: U4.13 22.385,35.76 25.75,39.125 30.923,39.125 31.923,40.125 R31.2
PWM_1: R13.2 R30.2 U2.39 U4.12 | length 46
  Top Layer w0.254: U2.39 28.5,13.125
  Top Layer w0.508: 21.115,30.75 U4.12 ; v1(21.625,15) 21.625,24.375 23.125,25.875 23.125,30.125 ; 28.5,13.125 v1(28.5,15)
  Top Layer w0.762: 21.115,30.75 21.115,30.125 23.125,30.125 27.125,30.125 29.5,32.5 30.625,32.5 ; R13.2 30.625,32.5 ; R30.2 31.071,35.125 30.625,34.679 30.625,32.5
  Bottom Layer w0.508: v1(21.625,15) v1(28.5,15)
PWM_2: J7.3 U2.41 | length 10.5
  Top Layer w0.254: 29.259,9.75 29.351,9.75 29.5,9.899 U2.41
  Top Layer w0.762: J7.3 29.054,4.125 29.5,4.571 29.5,7.04 29.259,7.281 29.259,9.75
PWM_3: R25.1 U2.43 | length 27.1
  Top Layer w0.254: v1(30.5,9.625) U2.43
  Top Layer w0.762: v1(49.75,9.625) 51.434,9.625 51.732,9.923 R25.1
  Bottom Layer w0.508: v1(30.5,9.625) 51.125,9.625
RGB_B: R9.1 U2.58 | length 7.3
  Top Layer w0.254: U2.58 36.703,18.25 36.914,18.039 37.336,18.039
  Top Layer w0.762: 37.336,18.039 38.336,18.039 39.25,17.125 41.732,17.125 R9.1
RGB_G: R8.1 U2.59 | length 7.2
  Top Layer w0.254: U2.59 37.125,18.75 37.976,19.601 38.5,19.601
  Top Layer w0.762: 38.5,19.601 41.708,19.601 R8.1
RGB_R: R7.1 U2.60 | length 9.2
  Top Layer w0.254: U2.60 36.875,19.25 37.375,19.75 37.375,21
  Top Layer w0.762: 37.375,21 37.375,21.804 37.821,22.25 R7.1
RST_TGTMCU: J1.10 J2.1 U2.64 | length 25.6
  Top Layer w0.254: U2.64 35.148,21.237 36.02,21.237 36.518,20.739 36.518,20.232 v1(36.625,20.125) ; J1.10 39.165,11.141 39.314,11.29 40.335,11.29 40.375,11.25
  Top Layer w0.762: v1(39,13) 39.014,13 39.922,12.091 39.929,12.091 40.375,11.645 40.375,11.25 40.375,9.5 43.182,9.5 43.625,9.057 43.625,7.02 J2.1
  Bottom Layer w0.508: v1(36.625,20.125) 38.952,20.125 39.25,19.827 39.25,17.229 39.011,16.991 39.011,13.011 v1(39,13)
SWD_CLK: J1.4 U2.52 | length 8.5
  Top Layer w0.254: U2.52 35.062,15.237 34.277,15.237 34.26,15.22 34.113,15.22 33.92,15.027 33.92,12.99 34.25,12.659 34.25,11.875 35.355,10.77 J1.4
SWD_IO: J1.2 U2.53 | length 9
  Top Layer w0.279: J1.2 34.085,11.04 33.603,11.522 33.603,12.642 33.45,12.795 33.45,15.433 33.767,15.75 U2.53
Vbat: C1.1 C2.1 D4.2 J4.1 L1.1 Vbat.1 | length 76.9
  Top Layer w0.762: C2.1 81.875,37.625 81.875,31.821 82.321,31.375 C1.1
  Top Layer w1.27: Vbat.1 78.125,37.75
  Top Layer w1.524: D4.2 77.857,58.125 78.75,57.232 78.75,53.268 79.643,52.375 81.875,52.375 ; L1.1@75.936,38.236 L1.1 76.2,37.75 78.5,37.75 ; C2.1 78.5,37.75 ; J4.1 91.165,52.375 81.875,52.375 ; 78.5,37.75 78.5,42.482 79.643,43.625 81.875,43.625 81.875,52.375
VCC: C0.1 J3.1 R10.2 U3.1 U3.2 | length 62.8
  Top Layer w0.762: U3.1 11.845,73.595 11.875,73.625 ; U3.2 11.51,74.865 11.875,74.5
  Top Layer w1.524: J3.1 6.782,59.383 10.26,59.383 10.5,59.143 ; R10.2 4.018,34 3.125,34.893 3.125,46.982 4.018,47.875 C0.1 9.607,47.875 10.5,48.768 10.5,59.143 ; 11.875,74.5 11.875,73.625 11.875,60.518 10.5,59.143
Vo: C21.1 L2.2 Q4.3 Q6.2 R16.2 R21.1 | length 107.2
  Top Layer w0.762: R16.2 40.125,42.643 40.125,46.554 40.571,47 43.661,47 44.107,47.446 R21.1 ; R21.1@43.982,51.5 43.982,58.125 46.948,58.125 47.394,57.679 47.394,56.969 Q6.2
  Top Layer w1.524: L2.2 44.638,78.612 ; 45.625,58.625 45.625,60.107 46.518,61 47.5,61 47.5,75.75 44.638,78.612 ; C21.1 44.713,82.95 44.638,82.875 ; Q4.3 67.665,92.482 66.772,93.375 50.25,93.375 44.638,87.763 44.638,82.875 ; 44.638,78.612 44.638,82.875
Vs: Q2.2 U3.3 U3.4 | length 35.6
  Top Layer w0.762: U3.3 11.885,76.135 12.25,76.5 ; U3.4 12.22,77.405 12.25,77.375
  Top Layer w1.524: 12.25,76.5 12.25,77.375 12.25,92.75 18.804,92.75 19.25,92.304 Q2.2
pads on no net: ASM1.0 ASM4.0 J1.6 J1.7 J1.8 J1.9 U2.1 U2.2 U2.3 U2.4 U2.5 U2.6 U2.7 U2.10 U2.13 U2.17 U2.18 U2.19 U2.26 U2.27 U2.28 U2.29 U2.30 U2.31 U2.32 U2.36 U2.37 U2.38 U2.40 U2.42 U2.44 U2.45 U2.46 U2.47 U2.48 U2.49 U2.50 U2.51 U2.54 U2.57 U2.61 U2.62 U2.63 U4.4 U4.5 U4.9 U4.10 U4.16

## Polygon pours and split planes (outlines as drawn)
GND on Bottom Layer "GND_L02_P000" (solid, pour order 0): 0,92 93,95 93,1 0,1

## Keep-outs
Keep-Out Layer:
  circle w0.254: c64.125,8.125 r2.151
  lines w0.305: 0,0 95.25,0 95.25,98.5 0,98.5 0,0

## Other copper
Bottom Layer:
  text "UTN.FRBA" at 90.85,9.9 h3

## Silkscreen, mask and mechanical layers (free items; w line width, h text height)
Top Overlay:
  rectangle: 68.875,1.125 83.875,9.125
  text "UTN.FRBA - MPTT - SOBRAL" at 3.512,95.012 h2.4
  text "CASING 1555SGY" at 62.762,94.637 h2.4
Mechanical 1:
  lines w0.254: -0.375,-0.375 95.5,-0.375 95.5,98.688
  lines w0.279: -0.375,-0.375 -0.375,98.875 95.5,98.875